# EAGLE board esp32_rtc_display_rev2_v46 (EAGLE 9.7.0), part 1 of 2
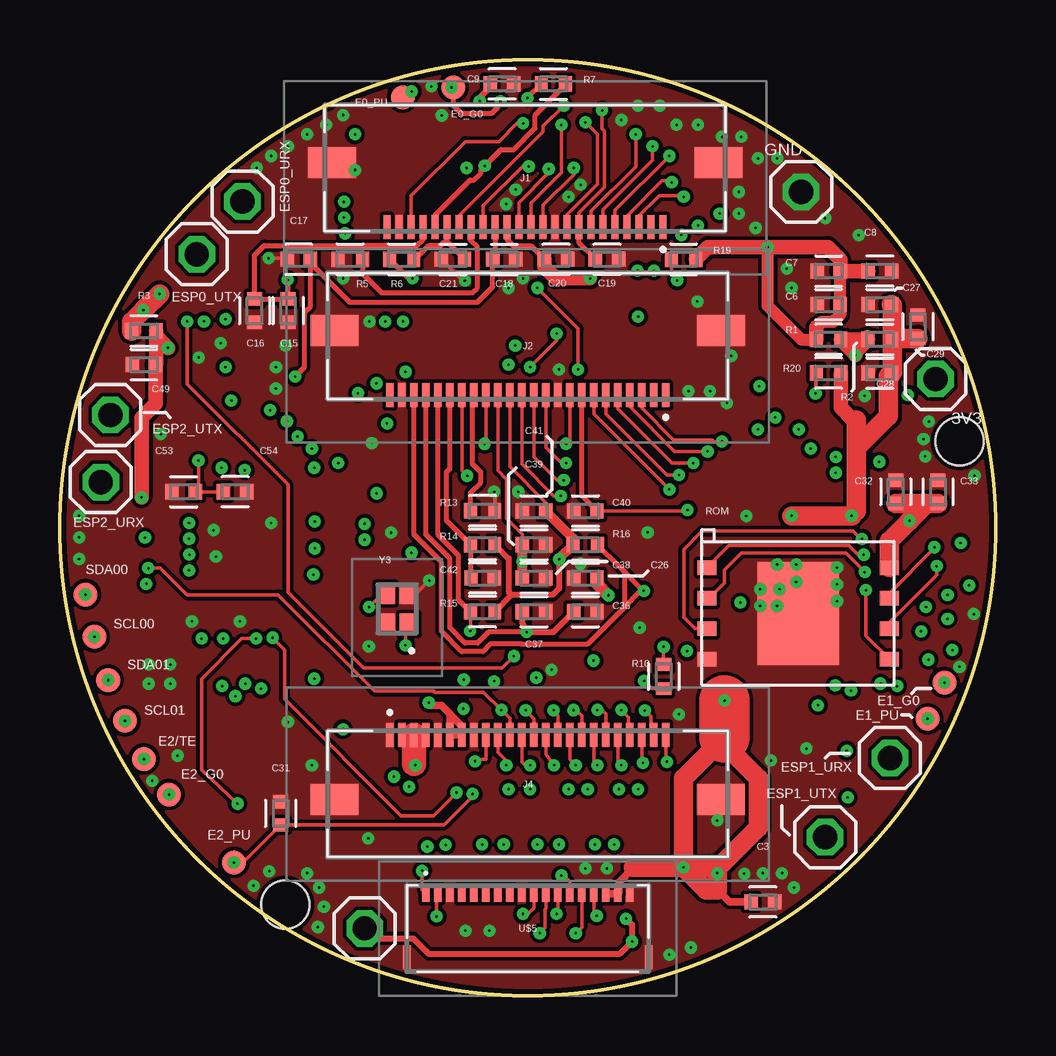
[diagram p0: board, top side]
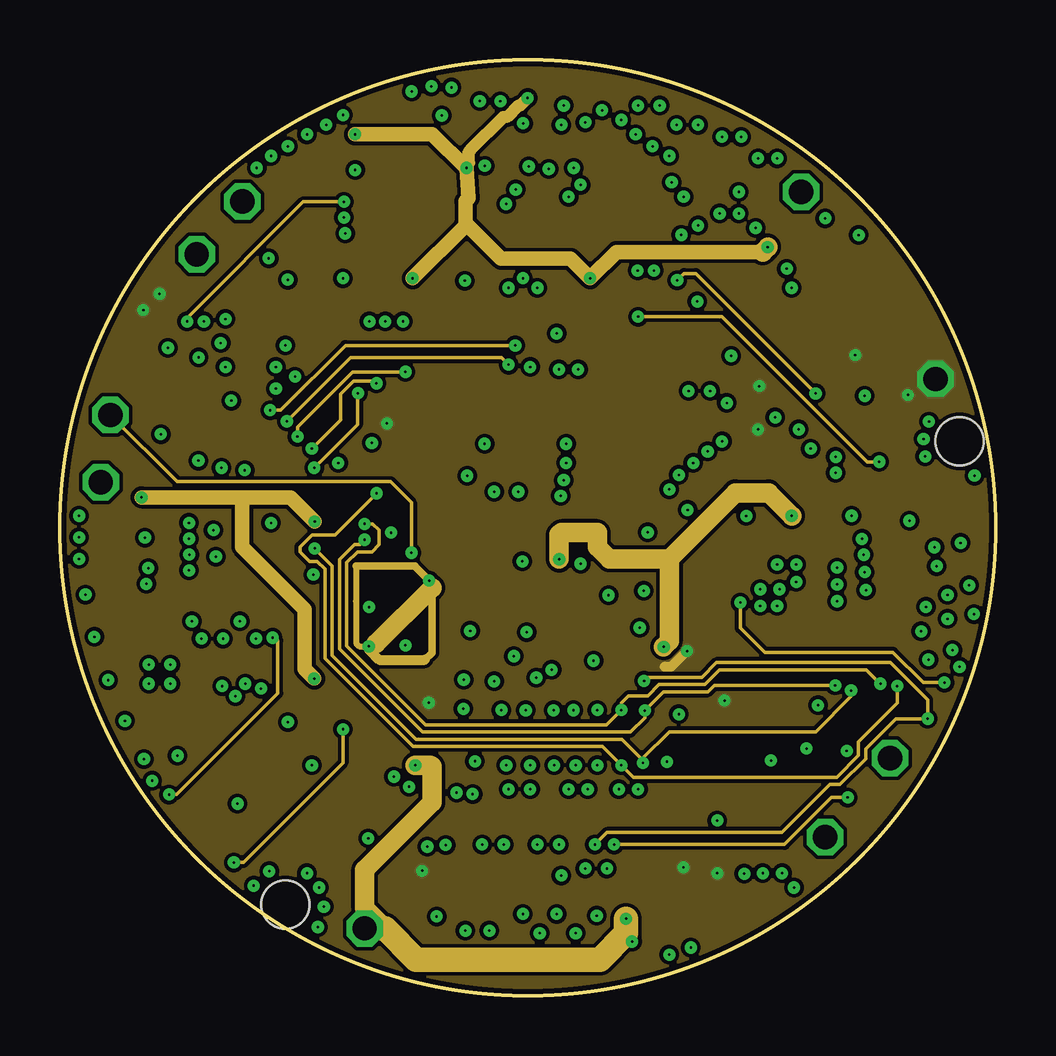
[diagram p1: board, inner layer Route2]
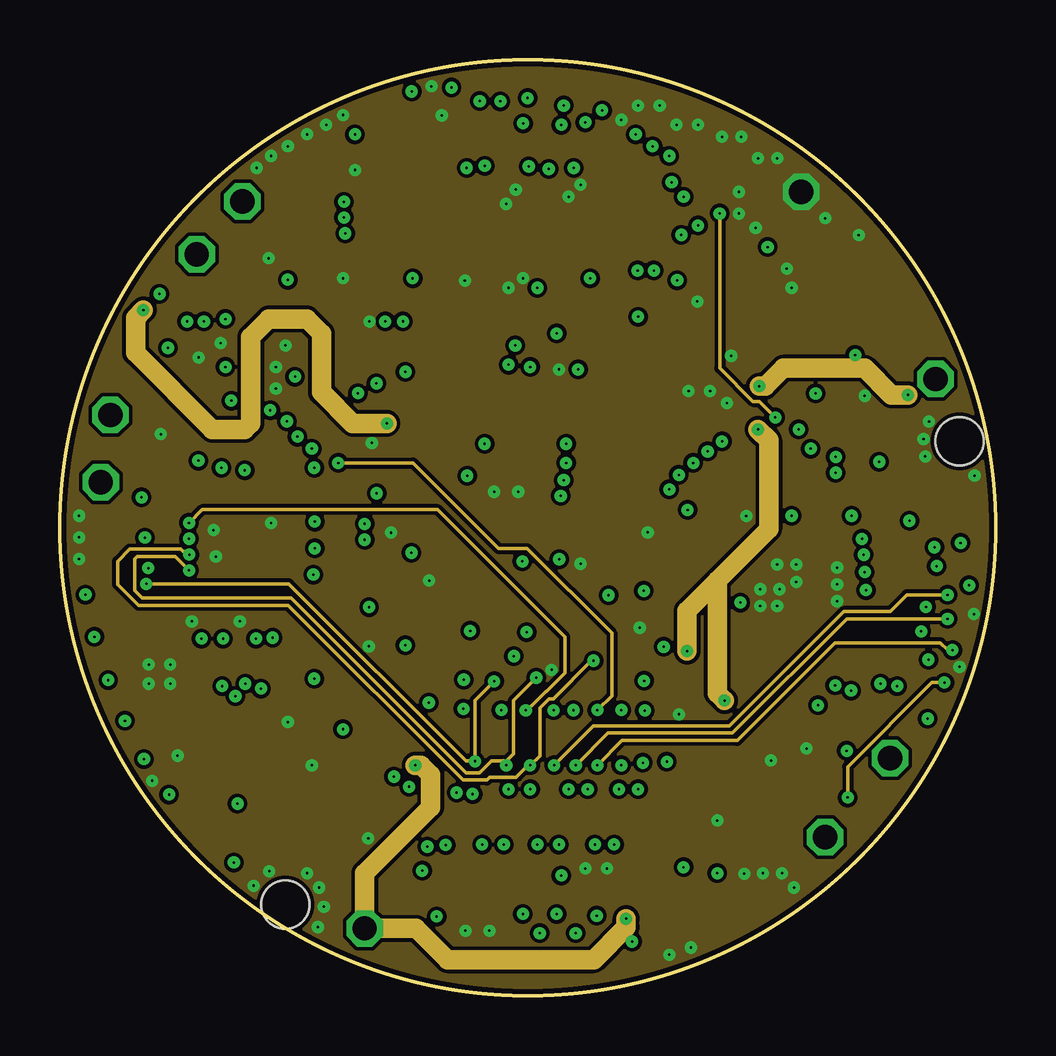
[diagram p2: board, inner layer Route3]
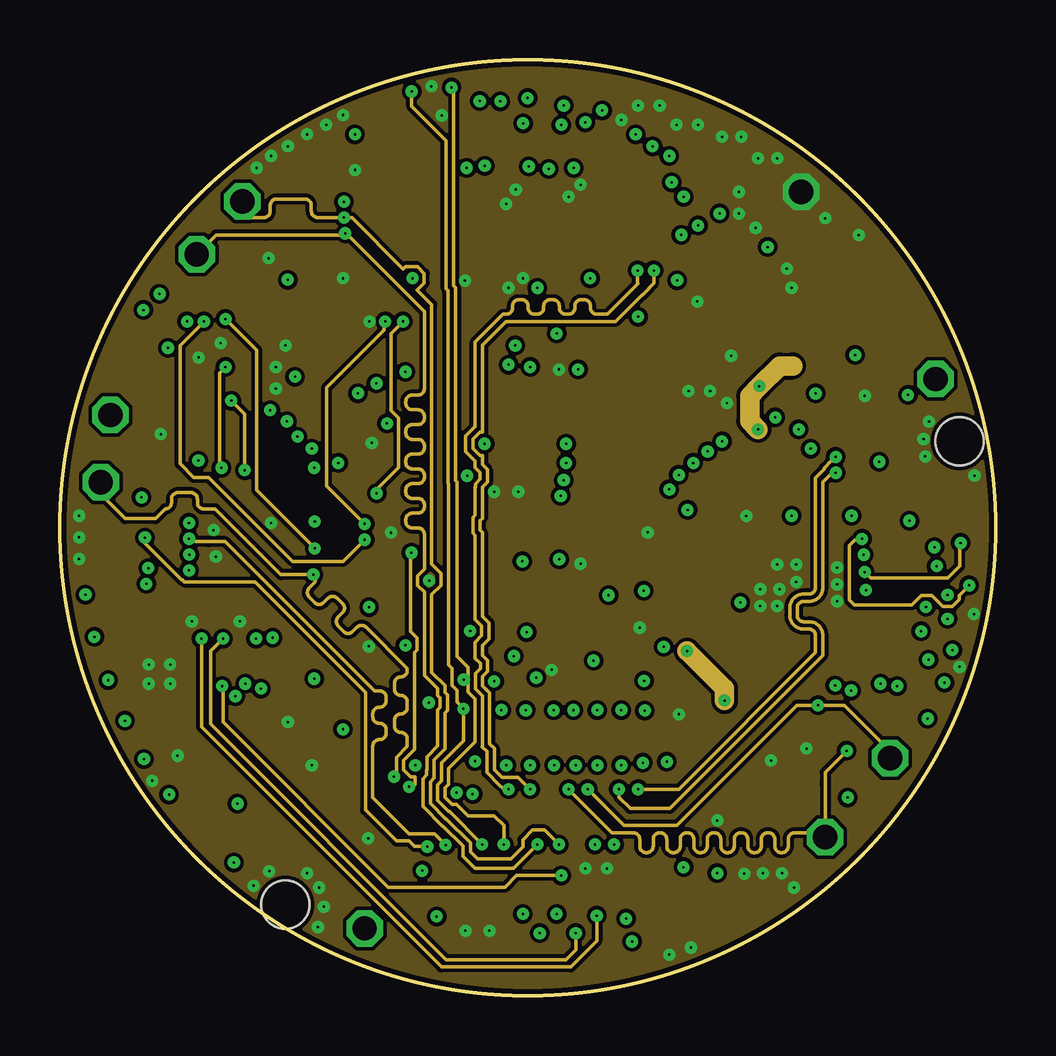
[diagram p3: board, inner layer Route14]
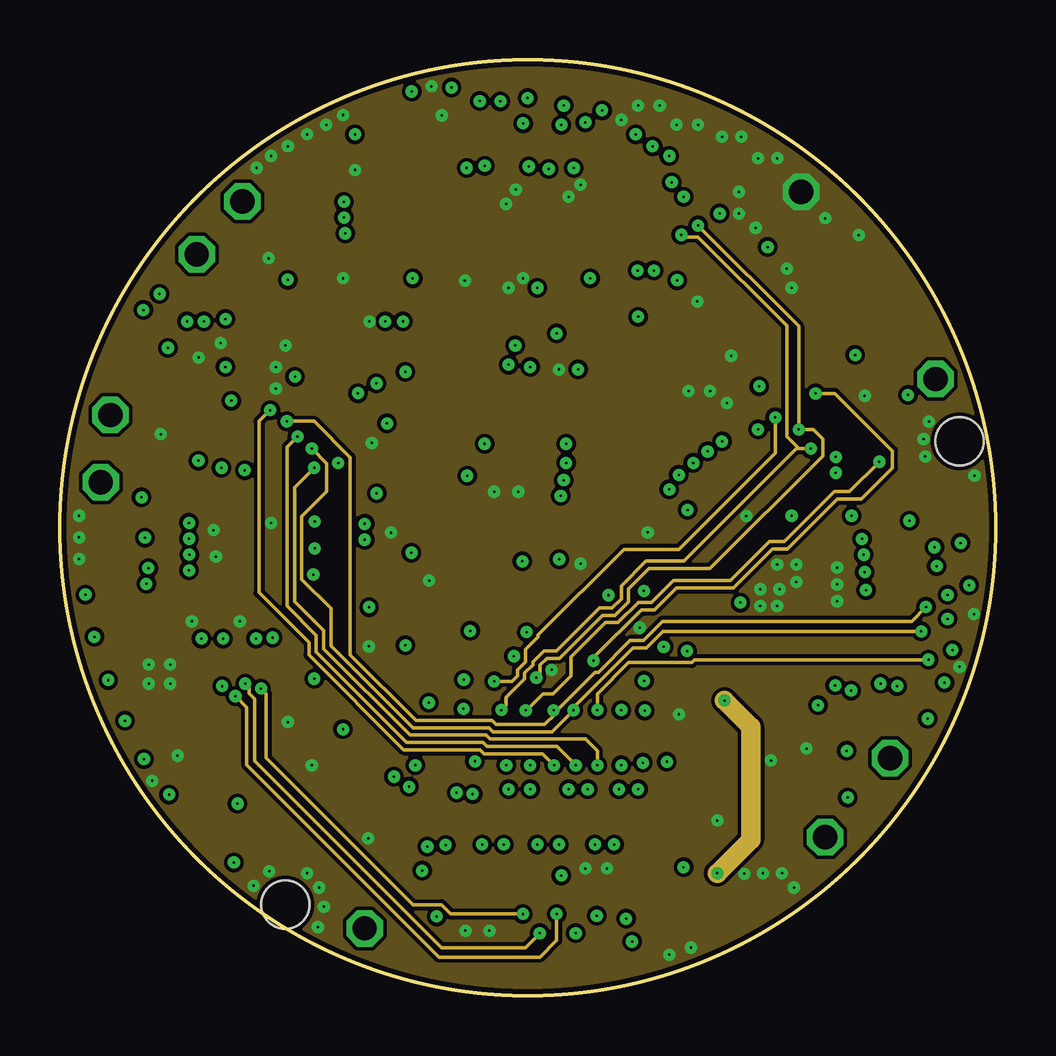
[diagram p4: board, inner layer Route15]
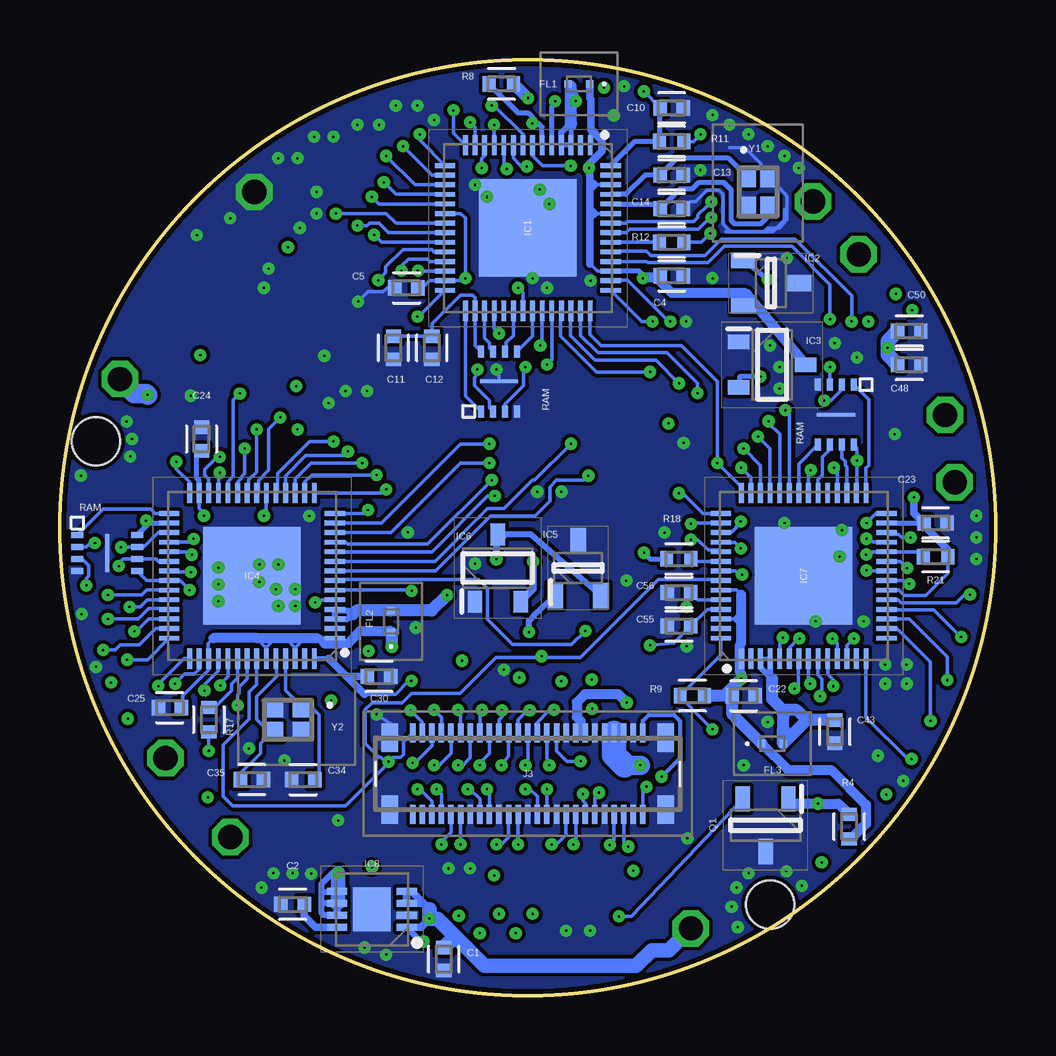
[diagram p5: board, bottom side, seen from below]

Size 39 x 39 mm. Coordinates in mm from the lower left corner, seen from the top.
Outline: circle at 19.5,19.5 radius 19.5
Copper layers (1+2*3+14*15+16): Top 0.035mm / dielectric 0.15mm / Route2 0.035mm / dielectric 0.15mm / Route3 0.035mm / dielectric 0.2mm / Route14 0.035mm / dielectric 0.15mm / Route15 0.035mm / dielectric 0.15mm / Bottom 0.035mm
Design rules "Fusion Electronics Design Rules": minimum track width 6mil, minimum drill 0.1mm, track to track 6mil, track to pad 6mil, pad to pad 6mil, via to via 6mil, smd to smd 6mil, copper to edge 0.2mm, drill to drill 6mil, minimum pad ring 10mil, minimum via ring 8mil, stop-mask expansion 4mil, vias tented up to drill 0mil, thermal gap 10mil
Holes 2 mm at 9.4,3.8 37.5,23.1

## Footprints (pad centres in the part's own frame; a part is rotated, then mirrored left to right if it is on the bottom)
1X01 = drill 1.016 octagon: 1 0,0
CAPC1005X60 = smd 0.56 x 0.629: 1 -0.485,0; 2 0.485,0
TP10R = smd 1 x 1: TP 0,0
PLEA67BBA2R2M1PT00 = smd 0.31 x 0.32: 1 -0.445,0; 2 0.445,0
QFN40P700X700X90-57N = smd 0.85 x 0.2: 1 -3.45,2.6; 2 -3.45,2.2; 3 -3.45,1.8; 4 -3.45,1.4; 5 -3.45,1; 6 -3.45,0.6; 7 -3.45,0.2; 8 -3.45,-0.2; 9 -3.45,-0.6; 10 -3.45,-1; 11 -3.45,-1.4; 12 -3.45,-1.8; 13 -3.45,-2.2; 14 -3.45,-2.6; 29 3.45,-2.6; 30 3.45,-2.2; 31 3.45,-1.8; 32 3.45,-1.4; 33 3.45,-1; 34 3.45,-0.6; 35 3.45,-0.2; 36 3.45,0.2; 37 3.45,0.6; 38 3.45,1; 39 3.45,1.4; 40 3.45,1.8; 41 3.45,2.2; 42 3.45,2.6 | smd 0.2 x 0.85: 15 -2.6,-3.45; 16 -2.2,-3.45; 17 -1.8,-3.45; 18 -1.4,-3.45; 19 -1,-3.45; 20 -0.6,-3.45; 21 -0.2,-3.45; 22 0.2,-3.45; 23 0.6,-3.45; 24 1,-3.45; 25 1.4,-3.45; 26 1.8,-3.45; 27 2.2,-3.45; 28 2.6,-3.45; 43 2.6,3.45; 44 2.2,3.45; 45 1.8,3.45; 46 1.4,3.45; 47 1,3.45; 48 0.6,3.45; 49 0.2,3.45; 50 -0.2,3.45; 51 -0.6,3.45; 52 -1,3.45; 53 -1.4,3.45; 54 -1.8,3.45; 55 -2.2,3.45; 56 -2.6,3.45 | smd 4.05 x 4.05: 57 0,0
SOT65P210X110-3N = smd 1.05 x 0.65: 1 -1.15,0.95; 2 -1.15,-0.95; 3 1.15,0
SOT95P280X130-3N = smd 0.9 x 0.6: 1 -1.4,0.95; 2 -1.4,-0.95; 3 1.4,0
SON50P300X300X80-9N = smd 0.85 x 0.3: 1 -1.45,0.75; 2 -1.45,0.25; 3 -1.45,-0.25; 4 -1.45,-0.75; 5 1.45,-0.75; 6 1.45,-0.25; 7 1.45,0.25; 8 1.45,0.75 | smd 1.55 x 1.84: 9 0,0
5052782433 = smd 0.3 x 1: 1 -5.75,2.475; 2 -5.25,2.475; 3 -4.75,2.475; 4 -4.25,2.475; 5 -3.75,2.475; 6 -3.25,2.475; 7 -2.75,2.475; 8 -2.25,2.475; 9 -1.75,2.475; 10 -1.25,2.475; 11 -0.75,2.475; 12 -0.25,2.475; 13 0.25,2.475; 14 0.75,2.475; 15 1.25,2.475; 16 1.75,2.475; 17 2.25,2.475; 18 2.75,2.475; 19 3.25,2.475; 20 3.75,2.475; 21 4.25,2.475; 22 4.75,2.475; 23 5.25,2.475; 24 5.75,2.475 | smd 2 x 1.3: MP1 -8.05,-0.225; MP2 8.05,-0.225
AXT350124 = smd 0.23 x 0.8: 1 -4.8,1.7; 2 -4.8,-1.7; 3 -4.4,1.7; 4 -4.4,-1.7; 5 -4,1.7; 6 -4,-1.7; 7 -3.6,1.7; 8 -3.6,-1.7; 9 -3.2,1.7; 10 -3.2,-1.7; 11 -2.8,1.7; 12 -2.8,-1.7; 13 -2.4,1.7; 14 -2.4,-1.7; 15 -2,1.7; 16 -2,-1.7; 17 -1.6,1.7; 18 -1.6,-1.7; 19 -1.2,1.7; 20 -1.2,-1.7; 21 -0.8,1.7; 22 -0.8,-1.7; 23 -0.4,1.7; 24 -0.4,-1.7; 25 0,1.7; 26 0,-1.7; 27 0.4,1.7; 28 0.4,-1.7; 29 0.8,1.7; 30 0.8,-1.7; 31 1.2,1.7; 32 1.2,-1.7; 33 1.6,1.7; 34 1.6,-1.7; 35 2,1.7; 36 2,-1.7; 37 2.4,1.7; 38 2.4,-1.7; 39 2.8,1.7; 40 2.8,-1.7; 41 3.2,1.7; 42 3.2,-1.7; 43 3.6,1.7; 44 3.6,-1.7; 45 4,1.7; 46 4,-1.7; 47 4.4,1.7; 48 4.4,-1.7; 49 4.8,1.7; 50 4.8,-1.7 | smd 0.7 x 1.2: MP1 -5.75,1.5; MP2 5.75,1.5; MP3 -5.75,-1.5; MP4 5.75,-1.5
SOT95P230X110-3N = smd 1.05 x 0.6: 1 -1.1,0.95; 2 -1.1,-0.95; 3 1.1,0
RESC1005X40 = smd 0.535 x 0.644: 1 -0.507,0; 2 0.507,0
APS1604M-3SQR-ZR = smd 0.5 x 0.25: /CE 0.25,1.75; S0/SIO[1] 0.25,1.25; SCLK 2.75,0.75; SI/SIO[0] 2.75,0.25; SIO[2] 0.25,0.75; SIO[3] 2.75,1.25; VDD 2.75,1.75; VSS 0.25,0.25 | smd 0.15 x 1.6: GND 1.5,1
W25Q128JVEIQ = smd 0.8 x 0.6: /CS 0.2,4.905; CLK 7.8,2.365; GND 0.2,1.095; IO0 7.8,1.095; IO1 0.2,3.635; IO2 0.2,2.365; IO3 7.8,3.635; VCC 7.8,4.905 | smd 3.4 x 4.3: NC 4,3
5034801800 = smd 0.3 x 0.7: 1 -4.25,-0.35; 2 -3.75,-0.35; 3 -3.25,-0.35; 4 -2.75,-0.35; 5 -2.25,-0.35; 6 -1.75,-0.35; 7 -1.25,-0.35; 8 -0.75,-0.35; 9 -0.25,-0.35; 10 0.25,-0.35; 11 0.75,-0.35; 12 1.25,-0.35; 13 1.75,-0.35; 14 2.25,-0.35; 15 2.75,-0.35; 16 3.25,-0.35; 17 3.75,-0.35; 18 4.25,-0.35 | smd 0.3 x 1: MP1 -5.04,-3; MP2 5.04,-3
ABM11W400000MHZ8B1UT3 = smd 0.875 x 0.775: 1 -0.638,-0.487; 2 0.637,-0.487; 3 0.637,0.488; 4 -0.638,0.488

## Placement (x,y rotation side)
3V3  PINHD-1X1  [1X01]  36.5,25.7 0 top
5V  PINHD-1X1  [1X01]  12.7,2.8 0 top
C1  4.7uf  [CAPC1005X60]  23,1.52 270 bottom
C2  10nf  [CAPC1005X60]  29.3,3.8 0 bottom
C3  4.7uf  [CAPC1005X60]  29.3,3.9 0 top
C4  0.1uf  [CAPC1005X60]  13.5,30 180 bottom
C5  0.1uf  [CAPC1005X60]  24.56,29.5 180 bottom
C6  22uf  [CAPC1005X60]  32.04,28.8 180 top
C7  0.56uf  [CAPC1005X60]  32.04,30.2 180 top
C8  100pf  [CAPC1005X60]  34.18,30.2 0 top
C9  0.1uf  [CAPC1005X60]  18.43,38 0 top
C10  1uf  [CAPC1005X60]  13.5,37 0 bottom
C11  1uf  [CAPC1005X60]  25.1,27 270 bottom
C12  0.1uf  [CAPC1005X60]  23.5,27 270 bottom
C13  8pf  [CAPC1005X60]  13.5,34.2 0 bottom
C14  8pf  [CAPC1005X60]  13.5,32.8 0 bottom
C15  0.1uf  [CAPC1005X60]  9.51,28.55 90 top
C16  10uf  [CAPC1005X60]  8.11,28.55 90 top
C17  10uf  [CAPC1005X60]  9.96,30.69 0 top
C18  0.1uf  [CAPC1005X60]  18.52,30.69 180 top
C19  15pf  [CAPC1005X60]  22.8,30.69 0 top
C20  0.1uf  [CAPC1005X60]  20.68,30.69 0 top
C21  0.1uf  [CAPC1005X60]  16.38,30.69 180 top
C22  0.1uf  [CAPC1005X60]  10.5,12.5 180 bottom
C23  0.1uf  [CAPC1005X60]  2.5,19.7 0 bottom
C24  0.1uf  [CAPC1005X60]  33.1,23.2 90 bottom
C25  0.1uf  [CAPC1005X60]  34.42,12 180 bottom
C26  0.1uf  [CAPC1005X60]  21.9,17.4 180 top
C27  22uf  [CAPC1005X60]  34.18,28.8 180 top
C28  0.56uf  [CAPC1005X60]  34.18,25.95 180 top
C29  100pf  [CAPC1005X60]  35.76,27.88 90 top
C30  1uf  [CAPC1005X60]  25.7,13.3 0 bottom
C31  1uf  [CAPC1005X60]  9.2,7.6 90 top
C32  1uf  [CAPC1005X60]  34.84,21 90 top
C33  0.1uf  [CAPC1005X60]  36.6,21 90 top
C34  8pf  [CAPC1005X60]  28.86,9 180 bottom
C35  8pf  [CAPC1005X60]  31,9 0 bottom
C36  0.1uf  [CAPC1005X60]  21.9,16 180 top
C37  10uf  [CAPC1005X60]  19.76,16 180 top
C38  10uf  [CAPC1005X60]  19.76,17.4 180 top
C39  0.1uf  [CAPC1005X60]  19.76,18.79 180 top
C40  15pf  [CAPC1005X60]  21.9,20.2 180 top
C41  0.1uf  [CAPC1005X60]  19.76,20.2 180 top
C42  0.1uf  [CAPC1005X60]  17.62,17.4 0 top
C43  0.1uf  [CAPC1005X60]  6.7,11 270 bottom
C48  22uf  [CAPC1005X60]  3.6,26.3 0 bottom
C49  0.56uf  [CAPC1005X60]  3.5,26.3 180 top
C50  100pf  [CAPC1005X60]  3.6,27.7 0 bottom
C53  1uf  [CAPC1005X60]  5.16,21 180 top
C54  0.1uf  [CAPC1005X60]  7.3,21 0 top
C55  8pf  [CAPC1005X60]  13.2,15.4 180 bottom
C56  8pf  [CAPC1005X60]  13.2,16.8 180 bottom
E0_G0  TPTP10R  [TP10R]  16.39,37.85 0 top
E0_PU  TPTP10R  [TP10R]  14.29,37.44 0 top
E1_G0  TPTP10R  [TP10R]  36.87,13.05 0 top
E1_PU  TPTP10R  [TP10R]  36.17,11.54 0 top
E2/TE  TPTP10R  [TP10R]  3.5,9.86 0 top
E2_G0  TPTP10R  [TP10R]  4.55,8.38 0 top
E2_PU  TPTP10R  [TP10R]  7.25,5.55 0 top
ESP0_URX  PINHD-1X1  [1X01]  7.61,33.1 0 top
ESP0_UTX  PINHD-1X1  [1X01]  5.7,30.9 0 top
ESP1_URX  PINHD-1X1  [1X01]  34.6,9.9 0 top
ESP1_UTX  PINHD-1X1  [1X01]  31.9,6.6 0 top
ESP2_URX  PINHD-1X1  [1X01]  1.7,21.4 0 top
ESP2_UTX  PINHD-1X1  [1X01]  2.1,24.2 0 top
FL1  PLEA67BBA2R2M-1PT00  [PLEA67BBA2R2M1PT00]  17.36,38 180 bottom
FL2  PLEA67BBA2R2M-1PT00  [PLEA67BBA2R2M1PT00]  25.2,15.6 90 bottom
FL3  PLEA67BBA2R2M-1PT00  [PLEA67BBA2R2M1PT00]  9.3,10.5 0 bottom
GND  PINHD-1X1  [1X01]  30.9,33.5 0 top
IC1  ESP32-S2  [QFN40P700X700X90-57N]  19.5,32 270 bottom
IC2  MCP1811AT-028_TT  [SOT65P210X110-3N]  9.36,29.7 0 bottom
IC3  XC6206P122MR-G  [SOT95P280X130-3N]  9.31,26.3 0 bottom
IC4  ESP32-S2  [QFN40P700X700X90-57N]  31,17.5 180 bottom
IC5  MCP1811AT-028_TT  [SOT65P210X110-3N]  17.4,17.82 90 bottom
IC6  XC6206P122MR-G  [SOT95P280X130-3N]  20.75,17.82 90 bottom
IC7  ESP32-S2  [QFN40P700X700X90-57N]  8,17.5 90 bottom
IC8  ADP1706ACPZ-3.3-R7  [SON50P300X300X80-9N]  26,3.6 180 bottom
J1  505278-2433  [5052782433]  19.39,34.5 180 top
J2  505278-2433  [5052782433]  19.5,27.5 180 top
J3  AXT350124  [AXT350124]  19.5,9.25 0 bottom
J4  505278-2433  [5052782433]  19.5,8.4 0 top
Q1  BSS138P,215  [SOT95P230X110-3N]  9.59,7.1 270 bottom
R1  0  [RESC1005X40]  32.04,27.35 0 top
R2  0  [RESC1005X40]  34.18,27.35 180 top
R3  0  [RESC1005X40]  3.5,27.7 180 top
R4  4.7K  [RESC1005X40]  6.1,7.04 270 bottom
R5  1k  [RESC1005X40]  12.1,30.69 180 top
R6  4.7K  [RESC1005X40]  14.24,30.69 180 top
R7  4.7K  [RESC1005X40]  20.57,38 180 top
R8  4.7K  [RESC1005X40]  20.6,38 0 bottom
R9  10K  [RESC1005X40]  12.64,12.5 0 bottom
R10  10K  [RESC1005X40]  25.16,13.3 90 top
R11  10K  [RESC1005X40]  13.5,35.6 0 bottom
R12  499  [RESC1005X40]  13.5,31.4 0 bottom
R13  1k  [RESC1005X40]  17.62,20.2 0 top
R14  4.7K  [RESC1005X40]  17.62,18.8 0 top
R15  4.7K  [RESC1005X40]  17.62,16 0 top
R16  4.7K  [RESC1005X40]  21.9,18.79 180 top
R17  499  [RESC1005X40]  32.8,11.5 90 bottom
R18  499  [RESC1005X40]  13.2,18.2 180 bottom
R19  10K  [RESC1005X40]  26,30.69 180 top
R20  10K  [RESC1005X40]  32.04,25.95 0 top
R21  10K  [RESC1005X40]  2.5,18.3 0 bottom
SCL00  TPTP10R  [TP10R]  1.43,14.95 0 top
SCL01  TPTP10R  [TP10R]  2.71,11.45 0 top
SDA00  TPTP10R  [TP10R]  1.07,16.71 0 top
SDA01  TPTP10R  [TP10R]  2.01,13.15 0 top
U$2  APS1604M-3SQR-ZR  [APS1604M-3SQR-ZR]  19.7,24.1 90 bottom
U$3  W25Q128JVEIQ  [W25Q128JVEIQ]  26.77,12.93 0 top
U$4  APS1604M-3SQR-ZR  [APS1604M-3SQR-ZR]  38.53,17.45 0 bottom
U$5  503480-1800  [5034801800]  19.5,4.6 0 top
U$6  APS1604M-3SQR-ZR  [APS1604M-3SQR-ZR]  7.65,25.71 270 bottom
Y1  ABM11W-40.0000MHZ-8-B1U-T3  [ABM11W400000MHZ8B1UT3]  9.9,33.5 270 bottom
Y2  ABM11W-40.0000MHZ-8-B1U-T3  [ABM11W400000MHZ8B1UT3]  29.5,11.5 180 bottom
Y3  ABM11W-40.0000MHZ-8-B1U-T3  [ABM11W400000MHZ8B1UT3]  14.06,16.12 90 top

## Library data of the parts
3V3 5V ESP0_URX ESP0_UTX ESP1_URX ESP1_UTX ESP2_URX ESP2_UTX GND = Connector; CATEGORY: CONNECTOR; SUB-CATEGORY: PIN-HEADER
C1-C43 C48-C50 C53-C56 = Capacitor; CATEGORY: Capacitor
E0_G0 E0_PU E1_G0 E1_PU E2/TE E2_G0 E2_PU SCL00 SCL01 SDA00 SDA01 = testpad
FL1-FL3 = PLEA67BBA2R2M-1PT00; DESCRIPTION: Fixed Inductors 2.2uH 20% 620mOhm 0.5A/002; HEIGHT: 0.8mm; MANUFACTURER_NAME: TDK; MANUFACTURER_PART_NUMBER: PLEA67BBA2R2M-1PT00; MOUSER_PART_NUMBER: 810-PLEA67BBA2R2M1PT; MOUSER_PRICE-STOCK: https://www.mouser.co.uk/ProductDetail/TDK/PLEA67BBA2R2M-1PT00?qs=CiayqK2gdcIbgqVnhPM2%252BA%3D%3D
IC1 IC4 IC7 = ESP32-S2; DESCRIPTION: SMD WI-FI IC, ESP32-S2, SINGAL-C; HEIGHT: 0.9mm; MANUFACTURER_NAME: Espressif Systems; MANUFACTURER_PART_NUMBER: ESP32-S2; MOUSER_PART_NUMBER: 356-ESP32-S2; MOUSER_PRICE-STOCK: https://www.mouser.co.uk/ProductDetail/Espressif-Systems/ESP32-S2?qs=GBLSl2Akirtmlui%2FgtDaSQ%3D%3D
IC2 IC5 = MCP1811AT-028_TT; DESCRIPTION: LDO Regulator Pos 2.8V 0.15A 3-Pin SOT-23 T/R; HEIGHT: 1.1mm; MANUFACTURER_NAME: Microchip; MANUFACTURER_PART_NUMBER: MCP1811AT-028/TT; MOUSER_PART_NUMBER: 579-MCP1811AT-028/TT; MOUSER_PRICE-STOCK: https://www.mouser.co.uk/ProductDetail/Microchip-Technology/MCP1811AT-028-TT?qs=byeeYqUIh0P62uXV3ShlCQ%3D%3D
IC3 IC6 = XC6206P122MR-G; DESCRIPTION: LDO Voltage Regulators 1uA Low Quiescent 3 Terminal, Low ESR Cap. Compatible, Voltage Regulator; HEIGHT: 1.3mm; MANUFACTURER_NAME: Torex; MANUFACTURER_PART_NUMBER: XC6206P122MR-G; MOUSER_PART_NUMBER: 865-XC6206P122MR-G; MOUSER_PRICE-STOCK: https://www.mouser.co.uk/ProductDetail/Torex-Semiconductor/XC6206P122MR-G?qs=AsjdqWjXhJ%2F35%2FU%2FZk2JYg%3D%3D
IC8 = ADP1706ACPZ-3.3-R7; DESCRIPTION: ANALOG DEVICES - ADP1706ACPZ-3.3-R7 - LDO, FIXED, 3.3V, 1A, LFCSP-8; HEIGHT: 0.8mm; MANUFACTURER_NAME: Analog Devices; MANUFACTURER_PART_NUMBER: ADP1706ACPZ-3.3-R7; MOUSER_PART_NUMBER: 584-ADP1706ACPZ3.3R7; MOUSER_PRICE-STOCK: https://www.mouser.com/Search/Refine.aspx?Keyword=584-ADP1706ACPZ3.3R7
J1 J2 = 505278-2433-main; DESCRIPTION: FFC & FPC Connectors 0.5 FFC ZIF BTM CONT 24Ckt R/A FRONT FLIP; HEIGHT: 2.15mm; MANUFACTURER_NAME: Molex; MANUFACTURER_PART_NUMBER: 505278-2433; MOUSER_PART_NUMBER: 538-505278-2433; MOUSER_PRICE-STOCK: https://www.mouser.co.uk/ProductDetail/Molex/505278-2433?qs=c8NFF48pVsA%2FR7fI7C8RJQ%3D%3D
J3 = AXT350124; DESCRIPTION: Board to Board & Mezzanine Connectors Socket 0.4mm pitch 50-PIN, NI-BARRIER; HEIGHT: 1.45mm; MANUFACTURER_NAME: Panasonic; MANUFACTURER_PART_NUMBER: AXT350124; MOUSER_PART_NUMBER: 769-AXT350124; MOUSER_PRICE-STOCK: https://www.mouser.co.uk/ProductDetail/Panasonic-Industrial-Devices/AXT350124?qs=3aug5cyrIbeP4I891VOOqg%3D%3D
J4 = 505278-2433-main; DESCRIPTION: FFC & FPC Connectors 0.5 FFC ZIF BTM CONT 24Ckt R/A FRONT FLIP; HEIGHT: 2.15mm; MANUFACTURER_NAME: Molex; MANUFACTURER_PART_NUMBER: 505278-2433; MOUSER_PART_NUMBER: 538-505278-2433; MOUSER_PRICE-STOCK: https://www.mouser.co.uk/ProductDetail/Molex/505278-2433?qs=c8NFF48pVsA%2FR7fI7C8RJQ%3D%3D; SPICEPREFIX: X
Q1 = BSS138P_215; DESCRIPTION: BSS138P,215 N-Channel MOSFET, 360 mA, 60 V, 3-Pin SOT-23 Nexperia; HEIGHT: 1.1mm; MANUFACTURER_NAME: Nexperia; MANUFACTURER_PART_NUMBER: BSS138P,215; MOUSER_PART_NUMBER: 771-BSS138P215; MOUSER_PRICE-STOCK: https://www.mouser.co.uk/ProductDetail/Nexperia/BSS138P215?qs=A1cBxND5mHJyVAOcRahidg%3D%3D
R1-R21 = Resistor; CATEGORY: Resistor; SUB-CATEGORY: Fixed
U$2 U$4 U$6 = APS1604M-3SQR-SN
U$3 = W25Q128JVEIQ TR
U$5 = 503480-1800; DESCRIPTION: Molex 503480 Series 0.5mm Pitch 18 Way SMT Female FPC Connector; HEIGHT: 1.87mm; MANUFACTURER_NAME: Molex; MANUFACTURER_PART_NUMBER: 503480-1800; MOUSER_PART_NUMBER: 538-503480-1800; MOUSER_PRICE-STOCK: https://www.mouser.co.uk/ProductDetail/Molex/503480-1800?qs=6kT3pPPHxnV1JeObKwf9bQ%3D%3D
Y1-Y3 = ABM11W-40.0000MHZ-8-B1U-T3; DESCRIPTION: Crystals 40MHz 8pF -20C +70C 10ppm; HEIGHT: 0.5mm; MANUFACTURER_NAME: ABRACON; MANUFACTURER_PART_NUMBER: ABM11W-40.0000MHZ-8-B1U-T3; MOUSER_PART_NUMBER: 815-11W40-8B1UT; MOUSER_PRICE-STOCK: https://www.mouser.co.uk/ProductDetail/ABRACON/ABM11W-400000MHZ-8-B1U-T3?qs=5aG0NVq1C4zBPqtAp7cErw%3D%3D

## Nets
3V3: 3V3.1 C3.1 IC8.5 IC8.6 IC8.7 J3.35 J3.37 J4.6 J4.7 R1.2 R2.2 R3.2 U$5.1 U$5.16 U$5.17
5V: 5V.1 C1.1 IC8.1 IC8.3 IC8.4 J3.41 J3.43 J3.45 J4.2 J4.3 J4.4
BACKLIGHT: IC7.6 Q1.1 R4.1
COMP/USB_N: J3.2
COMP/USB_P: J3.4
DATA0: IC1.47 IC4.47 IC7.47 J3.3 J4.23
DATA1: IC1.46 IC4.46 IC7.46 J3.5 J4.22
DATA2: IC1.44 IC4.44 IC7.44 J3.7 J4.21
DATA3: IC1.43 IC4.43 IC7.43 J3.9 J4.20
DATA4: IC1.42 IC4.42 IC7.42 J3.11 J4.19
DATA5: IC1.41 IC4.41 IC7.41 J3.13 J4.18
DATA6: IC1.40 IC4.40 IC7.40 J3.15 J4.17
DATA7: IC1.39 IC4.39 IC7.39 J3.17 J4.16
DATAC0: IC1.38 IC4.38 IC7.38 J3.19 J4.15
DATAC1: IC1.37 IC4.37 IC7.37 J3.21 J4.14
DATAC2: IC1.28 IC4.28 IC7.28 J3.23 J4.13
DATAC3: IC1.24 IC4.24 IC7.24 J3.25 J4.12 R19.2 R20.1 R21.1
DATAC4: IC1.23 IC4.23 IC7.23 J3.27 J4.11
DATAC5: IC1.22 IC4.22 IC7.22 J3.29 J4.10
DATAC6: IC1.21 IC4.21 IC7.21 J3.31 J4.9
DATAC7: IC1.50 IC4.50 IC7.50 J3.1 J4.24
DIS_SPI_CS: IC7.11 U$5.14
DIS_SPI_RESET: IC7.12 U$5.15
DIS_SPI_SCL: IC7.10 U$5.13
DIS_SPI_SDA: IC7.8 U$5.11
DIS_SPI_WR/A0: IC7.9 U$5.12
DIS_TE: IC7.7 U$5.10
ESP0/CAM_RST: C21.1 J1.19 R6.1
ESP0/USB_N: IC1.25 J3.28
ESP0/USB_P: IC1.26 J3.30
ESP0_1V2: C17.2 C18.2 IC3.2 J1.15
ESP0_2V8: C15.2 C16.2 IC2.1 J1.21
ESP0_3V3: C4.2 C5.1 C6.1 C7.1 C8.1 C20.1 FL1.1 IC1.1 IC1.20 IC1.27 IC1.45 IC1.51 IC1.54 IC2.2 IC3.3 J1.14 R1.1 R6.2 R7.2 R8.2 R11.2 R19.1
ESP0_G1/TWI_SDA: IC1.6 J1.22 R8.1
ESP0_G2/TWI_SCK: IC1.7 J1.20 R7.1
ESP0_G3/CSI_VSYNC: IC1.8 J1.18
ESP0_G4/CSI_HSYNC: IC1.9 J1.16
ESP0_G5/CSI_D7: IC1.10 J1.13
ESP0_G6/CSI_MCLK: IC1.11 J1.12
ESP0_G7/CSI_D6: IC1.12 J1.11
ESP0_G8/CSI_D5: IC1.13 J1.9
ESP0_G9/CSI_PCLK: C19.1 IC1.14 J1.8
ESP0_G10/CSI_D4: IC1.15 J1.7
ESP0_G11/CSI_D0: IC1.16 J1.6
ESP0_G12/CSI_D3: IC1.17 J1.5
ESP0_G13/CSI_D1: IC1.18 J1.4
ESP0_G14/CSI_D2: IC1.19 J1.3
ESP0_GPIO0: E0_G0.TP IC1.5 J3.34
ESP0_PU: C10.1 E0_PU.TP IC1.56 J3.36 R11.1
ESP0_SPICLK: IC1.34 U$2.SCLK
ESP0_SPICS0: IC1.33
ESP0_SPICS1: IC1.29 U$2./CE
ESP0_SPID: IC1.36 U$2.SI/SIO[0]
ESP0_SPIHD: IC1.31 U$2.SIO[3]
ESP0_SPIQ: IC1.35 U$2.S0/SIO[1]
ESP0_SPIWP: IC1.32 U$2.SIO[2]
ESP0_U_N: ESP0_URX.1 IC1.49 J3.22
ESP0_U_P: ESP0_UTX.1 J3.24 R12.2
ESP0_VDD_SPI: C11.1 C12.1 IC1.30 U$2.VDD
ESP1/CAM_RST: C42.1 J2.19 R14.1
ESP1/USB_N: IC4.26 J3.6
ESP1/USB_P: IC4.25 J3.8
ESP1_1V2: C38.2 C39.2 IC6.2 J2.15
ESP1_2V8: C36.2 C37.2 IC5.1 J2.21
ESP1_3V3: C24.1 C25.1 C27.1 C28.1 C29.1 C41.1 FL2.1 IC4.1 IC4.20 IC4.27 IC4.45 IC4.51 IC4.54 IC5.2 IC6.3 J2.14 R2.1 R10.2 R14.2 R15.2 R16.2 R20.2
ESP1_G1/TWI_SDA: IC4.6 J2.22 R16.1
ESP1_G2/TWI_SCK: IC4.7 J2.20 R15.1
ESP1_G3/CSI_VSYNC: IC4.8 J2.18
ESP1_G4/CSI_HSYNC: IC4.9 J2.16
ESP1_G5/CSI_D7: IC4.10 J2.13
ESP1_G6/CSI_MCLK: IC4.11 J2.12
ESP1_G7/CSI_D6: IC4.12 J2.11
ESP1_G8/CSI_D5: IC4.13 J2.9
ESP1_G9/CSI_PCLK: C40.1 IC4.14 J2.8
ESP1_G10/CSI_D4: IC4.15 J2.7
ESP1_G11/CSI_D0: IC4.16 J2.6
ESP1_G12/CSI_D3: IC4.17 J2.5
ESP1_G13/CSI_D1: IC4.18 J2.4
ESP1_G14/CSI_D2: IC4.19 J2.3
ESP1_GPIO0: E1_G0.TP IC4.5 J3.10
ESP1_PU: C30.1 E1_PU.TP IC4.56 J3.12 R10.1
ESP1_SPICLK: IC4.34 U$3.CLK U$4.SCLK
ESP1_SPICS0: IC4.33 U$3./CS
ESP1_SPICS1: IC4.29 U$4./CE
ESP1_SPID: IC4.36 U$3.IO0 U$4.SI/SIO[0]
ESP1_SPIHD: IC4.31 U$3.IO3 U$4.SIO[3]
ESP1_SPIQ: IC4.35 U$3.IO1 U$4.S0/SIO[1]
ESP1_SPIWP: IC4.32 U$3.IO2 U$4.SIO[2]
ESP1_U_N: ESP1_URX.1 IC4.49 J3.16
ESP1_U_P: ESP1_UTX.1 J3.18 R17.1
ESP1_VDD_SPI: C32.1 C33.1 IC4.30 U$3.VCC U$4.VDD
ESP2/USB_N: IC7.26 J3.46
ESP2/USB_P: IC7.25 J3.44
ESP2_3V3: C22.2 C23.1 C48.1 C49.1 C50.1 FL3.1 IC7.1 IC7.20 IC7.27 IC7.45 IC7.51 IC7.54 R3.1 R4.2 R9.2 R21.2
ESP2_G9/TE: E2/TE.TP IC7.14
ESP2_G11/I2C_SCL01: IC7.16 SCL01.TP
ESP2_G12/I2C_SDA01: IC7.17 SDA01.TP
ESP2_G13/I2C_SCL00: IC7.18 SCL00.TP
ESP2_G14/I2C_SDA00: IC7.19 SDA00.TP
ESP2_GPIO0: E2_G0.TP IC7.5 J3.40
ESP2_PU: C31.1 E2_PU.TP IC7.56 J3.38 R9.1
ESP2_SPICLK: IC7.34 U$6.SCLK
ESP2_SPICS0: IC7.33
ESP2_SPICS1: IC7.29 U$6./CE
ESP2_SPID: IC7.36 U$6.SI/SIO[0]
ESP2_SPIHD: IC7.31 U$6.SIO[3]
ESP2_SPIQ: IC7.35 U$6.S0/SIO[1]
ESP2_SPIWP: IC7.32 U$6.SIO[2]
ESP2_U_N: ESP2_URX.1 IC7.49 J3.49
ESP2_U_P: ESP2_UTX.1 J3.50 R18.2
ESP2_VDD_SPI: C53.1 C54.1 IC7.30 U$6.VDD
GND: C1.2 C2.1 C3.2 C4.1 C5.2 C6.2 C7.2 C8.2 C9.2 C10.2 C11.2 C12.2 C13.2 C14.2 C15.1 C16.1 C17.1 C18.1 C19.2 C20.2 C21.2 C22.1 C23.2 C24.2 C25.2 C26.2 C27.2 C28.2 C29.2 C30.2 C31.2 C32.2 C33.2 C34.2 C35.2 C36.1 C37.1 C38.1 C39.1 C40.2 C41.2 C42.2 C43.2 C48.2 C49.2 C50.2 C53.2 C54.2 C55.2 C56.2 GND.1 IC1.57 IC2.3 IC3.1 IC4.57 IC5.3 IC6.1 IC7.57 IC8.2 IC8.9 J1.10 J1.23 J1.MP1 J1.MP2 J2.10 J2.23 J2.MP1 J2.MP2 J3.14 J3.20 J3.26 J3.32 J3.33 J3.39 J3.42 J3.47 J3.48 J3.MP1 J3.MP2 J3.MP3 J3.MP4 J4.1 J4.5 J4.8 J4.MP1 J4.MP2 Q1.3 R5.2 R13.2 U$2.GND U$2.VSS U$3.GND U$3.NC U$4.GND U$4.VSS U$5.3 U$5.9 U$5.18 U$5.MP1 U$5.MP2 U$6.GND U$6.VSS Y1.2 Y1.4 Y2.2 Y2.4 Y3.2 Y3.4
LEDK: Q1.2 U$5.2
N$3: C2.2 IC8.8
N$4: C13.1 IC1.53 Y1.1
N$5: IC4.48 R17.2
N$6: IC1.48 R12.1
N$7: C14.1 IC1.52 Y1.3
N$12: C35.1 IC4.52 Y2.3
N$13: C34.1 IC4.53 Y2.1
N$14: J2.17 R13.1
N$20: C56.1 IC7.52 Y3.3
N$21: C55.1 IC7.53 Y3.1
N$22: J1.17 R5.1
N$29: IC7.48 R18.1
N$38: C9.1 FL1.2 IC1.3 IC1.4
N$43: C43.1 FL3.2 IC7.3 IC7.4
N$44: C26.1 FL2.2 IC4.3 IC4.4